# EAGLE board working (EAGLE 6.4)
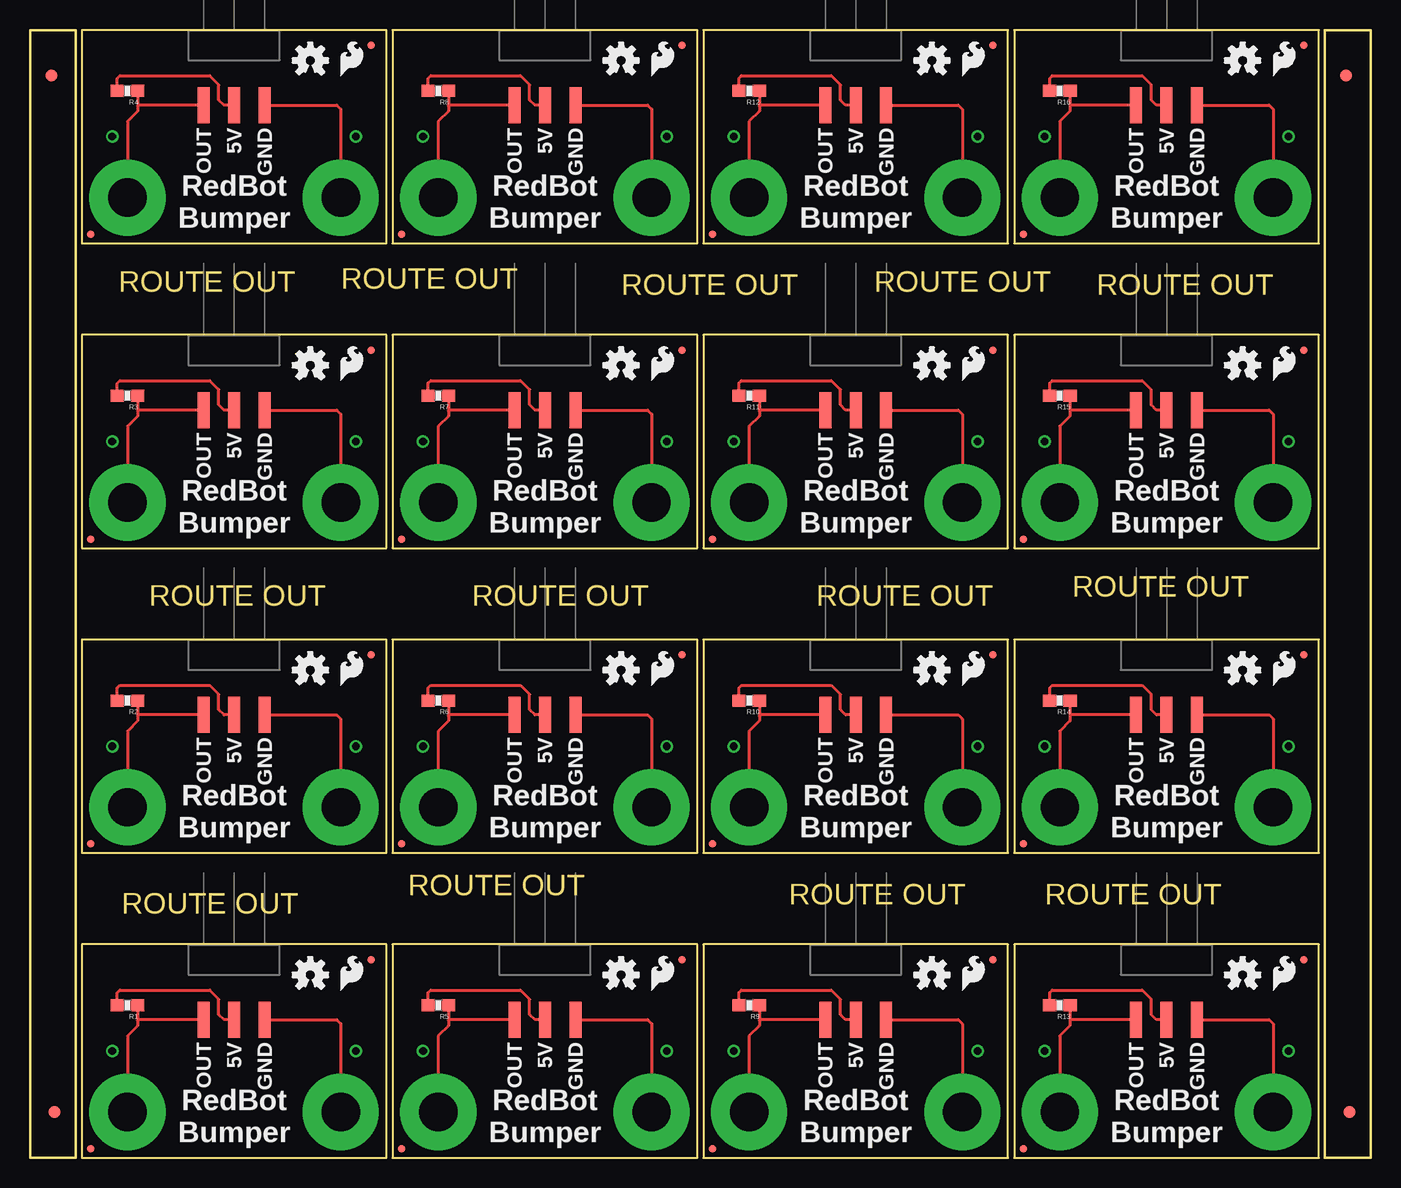
[diagram p0: board, top side]
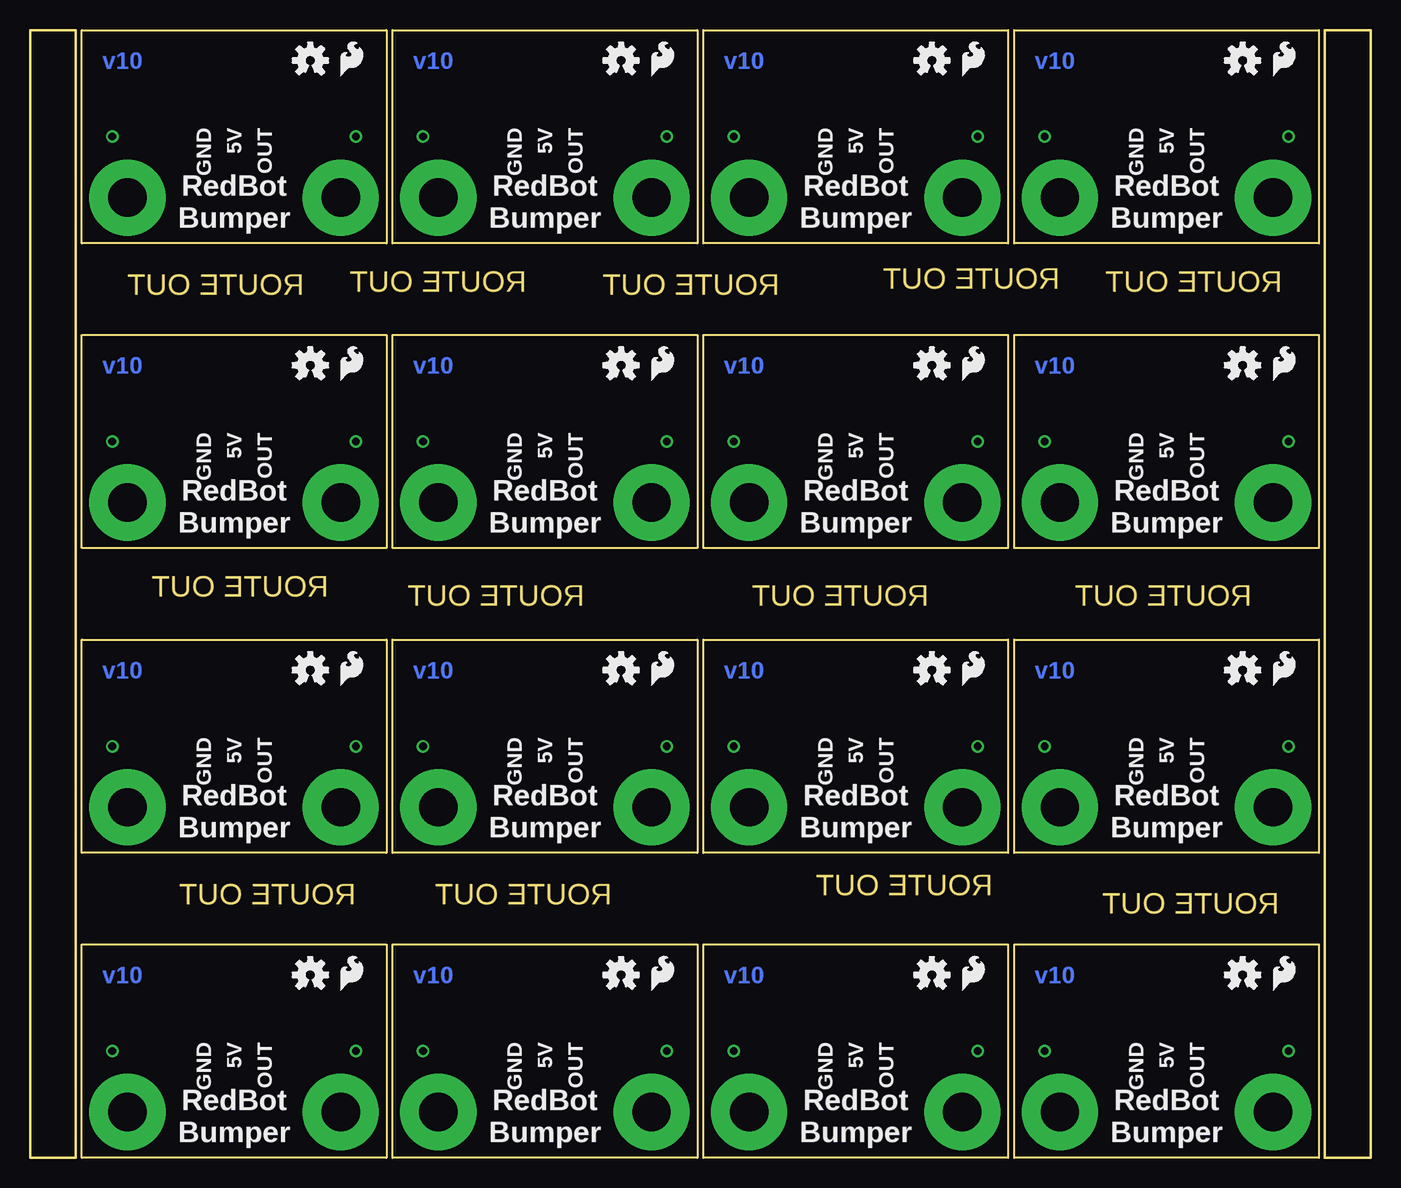
[diagram p1: board, bottom side, seen from below]

Size 111.76 x 93.98 mm. Coordinates in mm from the lower left corner, seen from the top.
Outline: 3.81,2.54 3.81,21.59
Outline: 3.81,21.59 3.81,88.9
Outline: 3.81,21.59 3.81,0 0,0 0,22.86
Outline: 0,91.44 0,72.39
Outline: 0,72.39 0,5.08
Outline: 0,72.39 0,93.98 3.81,93.98 3.81,71.12
Outline: 107.95,91.44 107.95,72.39
Outline: 107.95,72.39 107.95,5.08
Outline: 107.95,72.39 107.95,93.98 111.76,93.98 111.76,71.12
Outline: 111.76,2.54 111.76,21.59
Outline: 111.76,21.59 111.76,88.9
Outline: 111.76,21.59 111.76,0 107.95,0 107.95,22.86
Outline: 4.32,0 29.72,0 29.72,17.78 4.32,17.78 4.32,0
Outline: 4.32,25.4 29.72,25.4 29.72,43.18 4.32,43.18 4.32,25.4
Outline: 4.32,50.8 29.72,50.8 29.72,68.58 4.32,68.58 4.32,50.8
Outline: 4.32,76.2 29.72,76.2 29.72,93.98 4.32,93.98 4.32,76.2
Outline: 30.23,0 55.63,0 55.63,17.78 30.23,17.78 30.23,0
Outline: 30.23,25.4 55.63,25.4 55.63,43.18 30.23,43.18 30.23,25.4
Outline: 30.23,50.8 55.63,50.8 55.63,68.58 30.23,68.58 30.23,50.8
Outline: 30.23,76.2 55.63,76.2 55.63,93.98 30.23,93.98 30.23,76.2
Outline: 56.13,0 81.53,0 81.53,17.78 56.13,17.78 56.13,0
Outline: 56.13,25.4 81.53,25.4 81.53,43.18 56.13,43.18 56.13,25.4
Outline: 56.13,50.8 81.53,50.8 81.53,68.58 56.13,68.58 56.13,50.8
Outline: 56.13,76.2 81.53,76.2 81.53,93.98 56.13,93.98 56.13,76.2
Outline: 82.04,0 107.44,0 107.44,17.78 82.04,17.78 82.04,0
Outline: 82.04,25.4 107.44,25.4 107.44,43.18 82.04,43.18 82.04,25.4
Outline: 82.04,50.8 107.44,50.8 107.44,68.58 82.04,68.58 82.04,50.8
Outline: 82.04,76.2 107.44,76.2 107.44,93.98 82.04,93.98 82.04,76.2
Copper layers (1*16): Top 0.035mm / dielectric 1.5mm / Bottom 0.035mm
Design rules "default": minimum track width 10mil, minimum drill 0.6mm, track to track 8mil, track to pad 8mil, pad to pad 8mil, via to via 8mil, smd to smd 8mil, copper to edge 40mil, drill to drill 8mil, minimum pad ring 10mil, minimum via ring 8mil, stop-mask expansion 4mil, vias tented up to drill 0mil, thermal gap 10mil

## Footprints (pad centres in the part's own frame; a part is rotated, then mirrored left to right if it is on the bottom)
FIDUCIAL-1X2 = smd 1 x 1: 1 0,0
MICRO-FIDUCIAL = smd 0.635 x 0.635: 1 0,0
1X03_SMD_RA_MALE = smd 1 x 3: 1 -2.54,5; 2 0,5; 3 2.54,5
0603-RES = smd 1.1 x 1: 1 -0.85,0; 2 0.85,0
STANDOFF-ELECTRICAL = drill 3.2 pad 6.35: P1 0,0

## Placement (x,y rotation side)
E$1  [FIDUCIAL-1X2]  2.03,3.81 0 top
E$2  [FIDUCIAL-1X2]  1.78,90.17 180 top
E$3  [FIDUCIAL-1X2]  109.73,90.17 180 top
E$4  [FIDUCIAL-1X2]  109.98,3.81 0 top
FID1  FIDUCIALUFIDUCIAL  [MICRO-FIDUCIAL]  5.08,0.76 0 top
FID2  FIDUCIALUFIDUCIAL  [MICRO-FIDUCIAL]  28.45,16.51 0 top
FID3  FIDUCIALUFIDUCIAL  [MICRO-FIDUCIAL]  5.08,26.16 0 top
FID4  FIDUCIALUFIDUCIAL  [MICRO-FIDUCIAL]  28.45,41.91 0 top
FID5  FIDUCIALUFIDUCIAL  [MICRO-FIDUCIAL]  5.08,51.56 0 top
FID6  FIDUCIALUFIDUCIAL  [MICRO-FIDUCIAL]  28.45,67.31 0 top
FID7  FIDUCIALUFIDUCIAL  [MICRO-FIDUCIAL]  5.08,76.96 0 top
FID8  FIDUCIALUFIDUCIAL  [MICRO-FIDUCIAL]  28.45,92.71 0 top
FID9  FIDUCIALUFIDUCIAL  [MICRO-FIDUCIAL]  30.99,0.76 0 top
FID10  FIDUCIALUFIDUCIAL  [MICRO-FIDUCIAL]  54.36,16.51 0 top
FID11  FIDUCIALUFIDUCIAL  [MICRO-FIDUCIAL]  30.99,26.16 0 top
FID12  FIDUCIALUFIDUCIAL  [MICRO-FIDUCIAL]  54.36,41.91 0 top
FID13  FIDUCIALUFIDUCIAL  [MICRO-FIDUCIAL]  30.99,51.56 0 top
FID14  FIDUCIALUFIDUCIAL  [MICRO-FIDUCIAL]  54.36,67.31 0 top
FID15  FIDUCIALUFIDUCIAL  [MICRO-FIDUCIAL]  30.99,76.96 0 top
FID16  FIDUCIALUFIDUCIAL  [MICRO-FIDUCIAL]  54.36,92.71 0 top
FID17  FIDUCIALUFIDUCIAL  [MICRO-FIDUCIAL]  56.9,0.76 0 top
FID18  FIDUCIALUFIDUCIAL  [MICRO-FIDUCIAL]  80.26,16.51 0 top
FID19  FIDUCIALUFIDUCIAL  [MICRO-FIDUCIAL]  56.9,26.16 0 top
FID20  FIDUCIALUFIDUCIAL  [MICRO-FIDUCIAL]  80.26,41.91 0 top
FID21  FIDUCIALUFIDUCIAL  [MICRO-FIDUCIAL]  56.9,51.56 0 top
FID22  FIDUCIALUFIDUCIAL  [MICRO-FIDUCIAL]  80.26,67.31 0 top
FID23  FIDUCIALUFIDUCIAL  [MICRO-FIDUCIAL]  56.9,76.96 0 top
FID24  FIDUCIALUFIDUCIAL  [MICRO-FIDUCIAL]  80.26,92.71 0 top
FID25  FIDUCIALUFIDUCIAL  [MICRO-FIDUCIAL]  82.8,0.76 0 top
FID26  FIDUCIALUFIDUCIAL  [MICRO-FIDUCIAL]  106.17,16.51 0 top
FID27  FIDUCIALUFIDUCIAL  [MICRO-FIDUCIAL]  82.8,26.16 0 top
FID28  FIDUCIALUFIDUCIAL  [MICRO-FIDUCIAL]  106.17,41.91 0 top
FID29  FIDUCIALUFIDUCIAL  [MICRO-FIDUCIAL]  82.8,51.56 0 top
FID30  FIDUCIALUFIDUCIAL  [MICRO-FIDUCIAL]  106.17,67.31 0 top
FID31  FIDUCIALUFIDUCIAL  [MICRO-FIDUCIAL]  82.8,76.96 0 top
FID32  FIDUCIALUFIDUCIAL  [MICRO-FIDUCIAL]  106.17,92.71 0 top
JP1  [1X03_SMD_RA_MALE]  17.02,16.51 180 top
JP2  [1X03_SMD_RA_MALE]  17.02,41.91 180 top
JP3  [1X03_SMD_RA_MALE]  17.02,67.31 180 top
JP4  [1X03_SMD_RA_MALE]  17.02,92.71 180 top
JP5  [1X03_SMD_RA_MALE]  42.93,16.51 180 top
JP6  [1X03_SMD_RA_MALE]  42.93,41.91 180 top
JP7  [1X03_SMD_RA_MALE]  42.93,67.31 180 top
JP8  [1X03_SMD_RA_MALE]  42.93,92.71 180 top
JP9  [1X03_SMD_RA_MALE]  68.83,16.51 180 top
JP10  [1X03_SMD_RA_MALE]  68.83,41.91 180 top
JP11  [1X03_SMD_RA_MALE]  68.83,67.31 180 top
JP12  [1X03_SMD_RA_MALE]  68.83,92.71 180 top
JP13  [1X03_SMD_RA_MALE]  94.74,16.51 180 top
JP14  [1X03_SMD_RA_MALE]  94.74,41.91 180 top
JP15  [1X03_SMD_RA_MALE]  94.74,67.31 180 top
JP16  [1X03_SMD_RA_MALE]  94.74,92.71 180 top
LOGO1  OSHW-LOGOS  [OSHW-LOGO-S]  23.37,15.24 0 top
LOGO2  LOGO-SFESK  [SFE-LOGO-FLAME]  25.91,13.97 0 top
LOGO3  OSHW-LOGOS  [OSHW-LOGO-S]  10.67,15.24 0 bottom
LOGO4  LOGO-SFESK  [SFE-LOGO-FLAME]  8.13,13.97 0 bottom
LOGO5  OSHW-LOGOS  [OSHW-LOGO-S]  23.37,40.64 0 top
LOGO6  LOGO-SFESK  [SFE-LOGO-FLAME]  25.91,39.37 0 top
LOGO7  OSHW-LOGOS  [OSHW-LOGO-S]  10.67,40.64 0 bottom
LOGO8  LOGO-SFESK  [SFE-LOGO-FLAME]  8.13,39.37 0 bottom
LOGO9  OSHW-LOGOS  [OSHW-LOGO-S]  23.37,66.04 0 top
LOGO10  LOGO-SFESK  [SFE-LOGO-FLAME]  25.91,64.77 0 top
LOGO11  OSHW-LOGOS  [OSHW-LOGO-S]  10.67,66.04 0 bottom
LOGO12  LOGO-SFESK  [SFE-LOGO-FLAME]  8.13,64.77 0 bottom
LOGO13  OSHW-LOGOS  [OSHW-LOGO-S]  23.37,91.44 0 top
LOGO14  LOGO-SFESK  [SFE-LOGO-FLAME]  25.91,90.17 0 top
LOGO15  OSHW-LOGOS  [OSHW-LOGO-S]  10.67,91.44 0 bottom
LOGO16  LOGO-SFESK  [SFE-LOGO-FLAME]  8.13,90.17 0 bottom
LOGO17  OSHW-LOGOS  [OSHW-LOGO-S]  49.28,15.24 0 top
LOGO18  LOGO-SFESK  [SFE-LOGO-FLAME]  51.82,13.97 0 top
LOGO19  OSHW-LOGOS  [OSHW-LOGO-S]  36.58,15.24 0 bottom
LOGO20  LOGO-SFESK  [SFE-LOGO-FLAME]  34.04,13.97 0 bottom
LOGO21  OSHW-LOGOS  [OSHW-LOGO-S]  49.28,40.64 0 top
LOGO22  LOGO-SFESK  [SFE-LOGO-FLAME]  51.82,39.37 0 top
LOGO23  OSHW-LOGOS  [OSHW-LOGO-S]  36.58,40.64 0 bottom
LOGO24  LOGO-SFESK  [SFE-LOGO-FLAME]  34.04,39.37 0 bottom
LOGO25  OSHW-LOGOS  [OSHW-LOGO-S]  49.28,66.04 0 top
LOGO26  LOGO-SFESK  [SFE-LOGO-FLAME]  51.82,64.77 0 top
LOGO27  OSHW-LOGOS  [OSHW-LOGO-S]  36.58,66.04 0 bottom
LOGO28  LOGO-SFESK  [SFE-LOGO-FLAME]  34.04,64.77 0 bottom
LOGO29  OSHW-LOGOS  [OSHW-LOGO-S]  49.28,91.44 0 top
LOGO30  LOGO-SFESK  [SFE-LOGO-FLAME]  51.82,90.17 0 top
LOGO31  OSHW-LOGOS  [OSHW-LOGO-S]  36.58,91.44 0 bottom
LOGO32  LOGO-SFESK  [SFE-LOGO-FLAME]  34.04,90.17 0 bottom
LOGO33  OSHW-LOGOS  [OSHW-LOGO-S]  75.18,15.24 0 top
LOGO34  LOGO-SFESK  [SFE-LOGO-FLAME]  77.72,13.97 0 top
LOGO35  OSHW-LOGOS  [OSHW-LOGO-S]  62.48,15.24 0 bottom
LOGO36  LOGO-SFESK  [SFE-LOGO-FLAME]  59.94,13.97 0 bottom
LOGO37  OSHW-LOGOS  [OSHW-LOGO-S]  75.18,40.64 0 top
LOGO38  LOGO-SFESK  [SFE-LOGO-FLAME]  77.72,39.37 0 top
LOGO39  OSHW-LOGOS  [OSHW-LOGO-S]  62.48,40.64 0 bottom
LOGO40  LOGO-SFESK  [SFE-LOGO-FLAME]  59.94,39.37 0 bottom
LOGO41  OSHW-LOGOS  [OSHW-LOGO-S]  75.18,66.04 0 top
LOGO42  LOGO-SFESK  [SFE-LOGO-FLAME]  77.72,64.77 0 top
LOGO43  OSHW-LOGOS  [OSHW-LOGO-S]  62.48,66.04 0 bottom
LOGO44  LOGO-SFESK  [SFE-LOGO-FLAME]  59.94,64.77 0 bottom
LOGO45  OSHW-LOGOS  [OSHW-LOGO-S]  75.18,91.44 0 top
LOGO46  LOGO-SFESK  [SFE-LOGO-FLAME]  77.72,90.17 0 top
LOGO47  OSHW-LOGOS  [OSHW-LOGO-S]  62.48,91.44 0 bottom
LOGO48  LOGO-SFESK  [SFE-LOGO-FLAME]  59.94,90.17 0 bottom
LOGO49  OSHW-LOGOS  [OSHW-LOGO-S]  101.09,15.24 0 top
LOGO50  LOGO-SFESK  [SFE-LOGO-FLAME]  103.63,13.97 0 top
LOGO51  OSHW-LOGOS  [OSHW-LOGO-S]  88.39,15.24 0 bottom
LOGO52  LOGO-SFESK  [SFE-LOGO-FLAME]  85.85,13.97 0 bottom
LOGO53  OSHW-LOGOS  [OSHW-LOGO-S]  101.09,40.64 0 top
LOGO54  LOGO-SFESK  [SFE-LOGO-FLAME]  103.63,39.37 0 top
LOGO55  OSHW-LOGOS  [OSHW-LOGO-S]  88.39,40.64 0 bottom
LOGO56  LOGO-SFESK  [SFE-LOGO-FLAME]  85.85,39.37 0 bottom
LOGO57  OSHW-LOGOS  [OSHW-LOGO-S]  101.09,66.04 0 top
LOGO58  LOGO-SFESK  [SFE-LOGO-FLAME]  103.63,64.77 0 top
LOGO59  OSHW-LOGOS  [OSHW-LOGO-S]  88.39,66.04 0 bottom
LOGO60  LOGO-SFESK  [SFE-LOGO-FLAME]  85.85,64.77 0 bottom
LOGO61  OSHW-LOGOS  [OSHW-LOGO-S]  101.09,91.44 0 top
LOGO62  LOGO-SFESK  [SFE-LOGO-FLAME]  103.63,90.17 0 top
LOGO63  OSHW-LOGOS  [OSHW-LOGO-S]  88.39,91.44 0 bottom
LOGO64  LOGO-SFESK  [SFE-LOGO-FLAME]  85.85,90.17 0 bottom
R1  10K  [0603-RES]  8.13,12.7 180 top
R2  10K  [0603-RES]  8.13,38.1 180 top
R3  10K  [0603-RES]  8.13,63.5 180 top
R4  10K  [0603-RES]  8.13,88.9 180 top
R5  10K  [0603-RES]  34.04,12.7 180 top
R6  10K  [0603-RES]  34.04,38.1 180 top
R7  10K  [0603-RES]  34.04,63.5 180 top
R8  10K  [0603-RES]  34.04,88.9 180 top
R9  10K  [0603-RES]  59.94,12.7 180 top
R10  10K  [0603-RES]  59.94,38.1 180 top
R11  10K  [0603-RES]  59.94,63.5 180 top
R12  10K  [0603-RES]  59.94,88.9 180 top
R13  10K  [0603-RES]  85.85,12.7 180 top
R14  10K  [0603-RES]  85.85,38.1 180 top
R15  10K  [0603-RES]  85.85,63.5 180 top
R16  10K  [0603-RES]  85.85,88.9 180 top
S1  STANDOFF_ELECTRICAL  [STANDOFF-ELECTRICAL]  8.13,3.81 0 top
S2  STANDOFF_ELECTRICAL  [STANDOFF-ELECTRICAL]  25.91,3.81 0 top
S3  STANDOFF_ELECTRICAL  [STANDOFF-ELECTRICAL]  8.13,29.21 0 top
S4  STANDOFF_ELECTRICAL  [STANDOFF-ELECTRICAL]  25.91,29.21 0 top
S5  STANDOFF_ELECTRICAL  [STANDOFF-ELECTRICAL]  8.13,54.61 0 top
S6  STANDOFF_ELECTRICAL  [STANDOFF-ELECTRICAL]  25.91,54.61 0 top
S7  STANDOFF_ELECTRICAL  [STANDOFF-ELECTRICAL]  8.13,80.01 0 top
S8  STANDOFF_ELECTRICAL  [STANDOFF-ELECTRICAL]  25.91,80.01 0 top
S9  STANDOFF_ELECTRICAL  [STANDOFF-ELECTRICAL]  34.04,3.81 0 top
S10  STANDOFF_ELECTRICAL  [STANDOFF-ELECTRICAL]  51.82,3.81 0 top
S11  STANDOFF_ELECTRICAL  [STANDOFF-ELECTRICAL]  34.04,29.21 0 top
S12  STANDOFF_ELECTRICAL  [STANDOFF-ELECTRICAL]  51.82,29.21 0 top
S13  STANDOFF_ELECTRICAL  [STANDOFF-ELECTRICAL]  34.04,54.61 0 top
S14  STANDOFF_ELECTRICAL  [STANDOFF-ELECTRICAL]  51.82,54.61 0 top
S15  STANDOFF_ELECTRICAL  [STANDOFF-ELECTRICAL]  34.04,80.01 0 top
S16  STANDOFF_ELECTRICAL  [STANDOFF-ELECTRICAL]  51.82,80.01 0 top
S17  STANDOFF_ELECTRICAL  [STANDOFF-ELECTRICAL]  59.94,3.81 0 top
S18  STANDOFF_ELECTRICAL  [STANDOFF-ELECTRICAL]  77.72,3.81 0 top
S19  STANDOFF_ELECTRICAL  [STANDOFF-ELECTRICAL]  59.94,29.21 0 top
S20  STANDOFF_ELECTRICAL  [STANDOFF-ELECTRICAL]  77.72,29.21 0 top
S21  STANDOFF_ELECTRICAL  [STANDOFF-ELECTRICAL]  59.94,54.61 0 top
S22  STANDOFF_ELECTRICAL  [STANDOFF-ELECTRICAL]  77.72,54.61 0 top
S23  STANDOFF_ELECTRICAL  [STANDOFF-ELECTRICAL]  59.94,80.01 0 top
S24  STANDOFF_ELECTRICAL  [STANDOFF-ELECTRICAL]  77.72,80.01 0 top
S25  STANDOFF_ELECTRICAL  [STANDOFF-ELECTRICAL]  85.85,3.81 0 top
S26  STANDOFF_ELECTRICAL  [STANDOFF-ELECTRICAL]  103.63,3.81 0 top
S27  STANDOFF_ELECTRICAL  [STANDOFF-ELECTRICAL]  85.85,29.21 0 top
S28  STANDOFF_ELECTRICAL  [STANDOFF-ELECTRICAL]  103.63,29.21 0 top
S29  STANDOFF_ELECTRICAL  [STANDOFF-ELECTRICAL]  85.85,54.61 0 top
S30  STANDOFF_ELECTRICAL  [STANDOFF-ELECTRICAL]  103.63,54.61 0 top
S31  STANDOFF_ELECTRICAL  [STANDOFF-ELECTRICAL]  85.85,80.01 0 top
S32  STANDOFF_ELECTRICAL  [STANDOFF-ELECTRICAL]  103.63,80.01 0 top

## Library data of the parts
E$1-E$4 FID1-FID32 LOGO1-LOGO64 = SparkFun-Aesthetics
JP1-JP16 = SparkFun-Connectors; PROD_ID: CONN-10925
R1-R16 = SparkFun-Resistors; PROD_ID: RES-00824
S1-S32 = SparkFun-Electromechanical

## Nets
5V: JP1.2 R1.2
5V1: JP2.2 R2.2
5V2: JP3.2 R3.2
5V3: JP4.2 R4.2
5V4: JP5.2 R5.2
5V5: JP6.2 R6.2
5V6: JP7.2 R7.2
5V7: JP8.2 R8.2
5V8: JP9.2 R9.2
5V9: JP10.2 R10.2
5V10: JP11.2 R11.2
5V11: JP12.2 R12.2
5V12: JP13.2 R13.2
5V13: JP14.2 R14.2
5V14: JP15.2 R15.2
5V15: JP16.2 R16.2
GND: JP1.1 S2.P1
GND1: JP2.1 S4.P1
GND2: JP3.1 S6.P1
GND3: JP4.1 S8.P1
GND4: JP5.1 S10.P1
GND5: JP6.1 S12.P1
GND6: JP7.1 S14.P1
GND7: JP8.1 S16.P1
GND8: JP9.1 S18.P1
GND9: JP10.1 S20.P1
GND10: JP11.1 S22.P1
GND11: JP12.1 S24.P1
GND12: JP13.1 S26.P1
GND13: JP14.1 S28.P1
GND14: JP15.1 S30.P1
GND15: JP16.1 S32.P1
OUT: JP1.3 R1.1 S1.P1
OUT1: JP2.3 R2.1 S3.P1
OUT2: JP3.3 R3.1 S5.P1
OUT3: JP4.3 R4.1 S7.P1
OUT4: JP5.3 R5.1 S9.P1
OUT5: JP6.3 R6.1 S11.P1
OUT6: JP7.3 R7.1 S13.P1
OUT7: JP8.3 R8.1 S15.P1
OUT8: JP9.3 R9.1 S17.P1
OUT9: JP10.3 R10.1 S19.P1
OUT10: JP11.3 R11.1 S21.P1
OUT11: JP12.3 R12.1 S23.P1
OUT12: JP13.3 R13.1 S25.P1
OUT13: JP14.3 R14.1 S27.P1
OUT14: JP15.3 R15.1 S29.P1
OUT15: JP16.3 R16.1 S31.P1

## Tracks (layer width: path | path; a pad name or v marks a point on that pad's centre or on a via)
5V
  Top 0.254: JP1.2 16.18,11.51 15.75,11.94 15.75,13.21 14.99,13.97 7.49,13.97 7.28,13.76 R1.2
5V1
  Top 0.254: JP2.2 16.18,36.91 15.75,37.34 15.75,38.61 14.99,39.37 7.49,39.37 7.28,39.16 R2.2
5V2
  Top 0.254: JP3.2 16.18,62.31 15.75,62.74 15.75,64.01 14.99,64.77 7.49,64.77 7.28,64.56 R3.2
5V3
  Top 0.254: JP4.2 16.18,87.71 15.75,88.14 15.75,89.41 14.99,90.17 7.49,90.17 7.28,89.95 R4.2
5V4
  Top 0.254: JP5.2 42.08,11.51 41.66,11.94 41.66,13.21 40.89,13.97 33.4,13.97 33.19,13.76 R5.2
5V5
  Top 0.254: JP6.2 42.08,36.91 41.66,37.34 41.66,38.61 40.89,39.37 33.4,39.37 33.19,39.16 R6.2
5V6
  Top 0.254: JP7.2 42.08,62.31 41.66,62.74 41.66,64.01 40.89,64.77 33.4,64.77 33.19,64.56 R7.2
5V7
  Top 0.254: JP8.2 42.08,87.71 41.66,88.14 41.66,89.41 40.89,90.17 33.4,90.17 33.19,89.95 R8.2
5V8
  Top 0.254: JP9.2 67.99,11.51 67.56,11.94 67.56,13.21 66.8,13.97 59.31,13.97 59.09,13.76 R9.2
5V9
  Top 0.254: JP10.2 67.99,36.91 67.56,37.34 67.56,38.61 66.8,39.37 59.31,39.37 59.09,39.16 R10.2
5V10
  Top 0.254: JP11.2 67.99,62.31 67.56,62.74 67.56,64.01 66.8,64.77 59.31,64.77 59.09,64.56 R11.2
5V11
  Top 0.254: JP12.2 67.99,87.71 67.56,88.14 67.56,89.41 66.8,90.17 59.31,90.17 59.09,89.95 R12.2
5V12
  Top 0.254: JP13.2 93.9,11.51 93.47,11.94 93.47,13.21 92.71,13.97 85.22,13.97 85,13.76 R13.2
5V13
  Top 0.254: JP14.2 93.9,36.91 93.47,37.34 93.47,38.61 92.71,39.37 85.22,39.37 85,39.16 R14.2
5V14
  Top 0.254: JP15.2 93.9,62.31 93.47,62.74 93.47,64.01 92.71,64.77 85.22,64.77 85,64.56 R15.2
5V15
  Top 0.254: JP16.2 93.9,87.71 93.47,88.14 93.47,89.41 92.71,90.17 85.22,90.17 85,89.95 R16.2
GND
  Top 0.254: JP1.1 25.57,11.51 25.91,11.18 S2.P1
GND1
  Top 0.254: JP2.1 25.57,36.91 25.91,36.58 S4.P1
GND2
  Top 0.254: JP3.1 25.57,62.31 25.91,61.98 S6.P1
GND3
  Top 0.254: JP4.1 25.57,87.71 25.91,87.38 S8.P1
GND4
  Top 0.254: JP5.1 51.48,11.51 51.82,11.18 S10.P1
GND5
  Top 0.254: JP6.1 51.48,36.91 51.82,36.58 S12.P1
GND6
  Top 0.254: JP7.1 51.48,62.31 51.82,61.98 S14.P1
GND7
  Top 0.254: JP8.1 51.48,87.71 51.82,87.38 S16.P1
GND8
  Top 0.254: JP9.1 77.39,11.51 77.72,11.18 S18.P1
GND9
  Top 0.254: JP10.1 77.39,36.91 77.72,36.58 S20.P1
GND10
  Top 0.254: JP11.1 77.39,62.31 77.72,61.98 S22.P1
GND11
  Top 0.254: JP12.1 77.39,87.71 77.72,87.38 S24.P1
GND12
  Top 0.254: JP13.1 103.3,11.51 103.63,11.18 S26.P1
GND13
  Top 0.254: JP14.1 103.3,36.91 103.63,36.58 S28.P1
GND14
  Top 0.254: JP15.1 103.3,62.31 103.63,61.98 S30.P1
GND15
  Top 0.254: JP16.1 103.3,87.71 103.63,87.38 S32.P1
N$1  (via drill 0.64)
  other vias: 6.86,8.89
N$2  (via drill 0.64)
  other vias: 27.18,8.89
N$3  (via drill 0.64)
  other vias: 6.86,34.29
N$4  (via drill 0.64)
  other vias: 27.18,34.29
N$5  (via drill 0.64)
  other vias: 6.86,59.69
N$6  (via drill 0.64)
  other vias: 27.18,59.69
N$7  (via drill 0.64)
  other vias: 6.86,85.09
N$8  (via drill 0.64)
  other vias: 27.18,85.09
N$9  (via drill 0.64)
  other vias: 32.77,8.89
N$10  (via drill 0.64)
  other vias: 53.09,8.89
N$11  (via drill 0.64)
  other vias: 32.77,34.29
N$12  (via drill 0.64)
  other vias: 53.09,34.29
N$13  (via drill 0.64)
  other vias: 32.77,59.69
N$14  (via drill 0.64)
  other vias: 53.09,59.69
N$15  (via drill 0.64)
  other vias: 32.77,85.09
N$16  (via drill 0.64)
  other vias: 53.09,85.09
N$17  (via drill 0.64)
  other vias: 58.67,8.89
N$18  (via drill 0.64)
  other vias: 78.99,8.89
N$19  (via drill 0.64)
  other vias: 58.67,34.29
N$20  (via drill 0.64)
  other vias: 78.99,34.29
N$21  (via drill 0.64)
  other vias: 58.67,59.69
N$22  (via drill 0.64)
  other vias: 78.99,59.69
N$23  (via drill 0.64)
  other vias: 58.67,85.09
N$24  (via drill 0.64)
  other vias: 78.99,85.09
N$25  (via drill 0.64)
  other vias: 84.58,8.89
N$26  (via drill 0.64)
  other vias: 104.9,8.89
N$27  (via drill 0.64)
  other vias: 84.58,34.29
N$28  (via drill 0.64)
  other vias: 104.9,34.29
N$29  (via drill 0.64)
  other vias: 84.58,59.69
N$30  (via drill 0.64)
  other vias: 104.9,59.69
N$31  (via drill 0.64)
  other vias: 84.58,85.09
N$32  (via drill 0.64)
  other vias: 104.9,85.09
OUT
  Top 0.152: 9.06,11.51 8.98,11.43
  Top 0.254: R1.1 8.98,11.43 8.98,11.01 8.13,10.16 S1.P1 | JP1.3 9.06,11.51
OUT1
  Top 0.152: 9.06,36.91 8.98,36.83
  Top 0.254: R2.1 8.98,36.83 8.98,36.41 8.13,35.56 S3.P1 | JP2.3 9.06,36.91
OUT2
  Top 0.152: 9.06,62.31 8.98,62.23
  Top 0.254: R3.1 8.98,62.23 8.98,61.81 8.13,60.96 S5.P1 | JP3.3 9.06,62.31
OUT3
  Top 0.152: 9.06,87.71 8.98,87.63
  Top 0.254: R4.1 8.98,87.63 8.98,87.21 8.13,86.36 S7.P1 | JP4.3 9.06,87.71
OUT4
  Top 0.152: 34.97,11.51 34.89,11.43
  Top 0.254: R5.1 34.89,11.43 34.89,11.01 34.04,10.16 S9.P1 | JP5.3 34.97,11.51
OUT5
  Top 0.152: 34.97,36.91 34.89,36.83
  Top 0.254: R6.1 34.89,36.83 34.89,36.41 34.04,35.56 S11.P1 | JP6.3 34.97,36.91
OUT6
  Top 0.152: 34.97,62.31 34.89,62.23
  Top 0.254: R7.1 34.89,62.23 34.89,61.81 34.04,60.96 S13.P1 | JP7.3 34.97,62.31
OUT7
  Top 0.152: 34.97,87.71 34.89,87.63
  Top 0.254: R8.1 34.89,87.63 34.89,87.21 34.04,86.36 S15.P1 | JP8.3 34.97,87.71
OUT8
  Top 0.152: 60.87,11.51 60.79,11.43
  Top 0.254: R9.1 60.79,11.43 60.79,11.01 59.94,10.16 S17.P1 | JP9.3 60.87,11.51
OUT9
  Top 0.152: 60.87,36.91 60.79,36.83
  Top 0.254: R10.1 60.79,36.83 60.79,36.41 59.94,35.56 S19.P1 | JP10.3 60.87,36.91
OUT10
  Top 0.152: 60.87,62.31 60.79,62.23
  Top 0.254: R11.1 60.79,62.23 60.79,61.81 59.94,60.96 S21.P1 | JP11.3 60.87,62.31
OUT11
  Top 0.152: 60.87,87.71 60.79,87.63
  Top 0.254: R12.1 60.79,87.63 60.79,87.21 59.94,86.36 S23.P1 | JP12.3 60.87,87.71
OUT12
  Top 0.152: 86.78,11.51 86.7,11.43
  Top 0.254: R13.1 86.7,11.43 86.7,11.01 85.85,10.16 S25.P1 | JP13.3 86.78,11.51
OUT13
  Top 0.152: 86.78,36.91 86.7,36.83
  Top 0.254: R14.1 86.7,36.83 86.7,36.41 85.85,35.56 S27.P1 | JP14.3 86.78,36.91
OUT14
  Top 0.152: 86.78,62.31 86.7,62.23
  Top 0.254: R15.1 86.7,62.23 86.7,61.81 85.85,60.96 S29.P1 | JP15.3 86.78,62.31
OUT15
  Top 0.152: 86.78,87.71 86.7,87.63
  Top 0.254: R16.1 86.7,87.63 86.7,87.21 85.85,86.36 S31.P1 | JP16.3 86.78,87.71

## Text on the board
Bottom: v10 | v10 | v10 | v10 | v10 | v10 | v10 | v10 | v10 | v10 | v10 | v10 | v10 | v10 | v10 | v10
Dimension: ROUTE OUT | ROUTE OUT | ROUTE OUT | ROUTE OUT | ROUTE OUT | ROUTE OUT | ROUTE OUT | ROUTE OUT | ROUTE OUT | ROUTE OUT | ROUTE OUT | ROUTE OUT | ROUTE OUT
tPlace: OUT | 5V | GND | OUT | 5V | GND | OUT | 5V | GND | OUT | 5V | GND | RedBot / Bumper | RedBot / Bumper | RedBot / Bumper | RedBot / Bumper | OUT | 5V | GND | OUT | 5V | GND | OUT | 5V | GND | OUT | 5V | GND | RedBot / Bumper | RedBot / Bumper | RedBot / Bumper | RedBot / Bumper | OUT | 5V | GND | OUT | 5V | GND | OUT | 5V | GND | OUT | 5V | GND | RedBot / Bumper | RedBot / Bumper | RedBot / Bumper | RedBot / Bumper | OUT | 5V | GND | OUT | 5V | GND | OUT | 5V | GND | OUT | 5V | GND | RedBot / Bumper | RedBot / Bumper | RedBot / Bumper | RedBot / Bumper
bPlace: OUT | 5V | GND | OUT | 5V | GND | OUT | 5V | GND | OUT | 5V | GND | RedBot / Bumper | RedBot / Bumper | RedBot / Bumper | RedBot / Bumper | OUT | 5V | GND | OUT | 5V | GND | OUT | 5V | GND | OUT | 5V | GND | RedBot / Bumper | RedBot / Bumper | RedBot / Bumper | RedBot / Bumper | OUT | 5V | GND | OUT | 5V | GND | OUT | 5V | GND | OUT | 5V | GND | RedBot / Bumper | RedBot / Bumper | RedBot / Bumper | RedBot / Bumper | OUT | 5V | GND | OUT | 5V | GND | OUT | 5V | GND | OUT | 5V | GND | RedBot / Bumper | RedBot / Bumper | RedBot / Bumper | RedBot / Bumper